# Altium PCB 编码器v6.0.PcbDoc
Units mil, origin at the board's own origin, x right, y up, seen from the top; angles counter-clockwise.
Board outline 2920.03 x 1708.32 mil, 2 copper layers (Top Layer, Bottom Layer); 85 components, 81 nets, 300 pads, 297 vias.
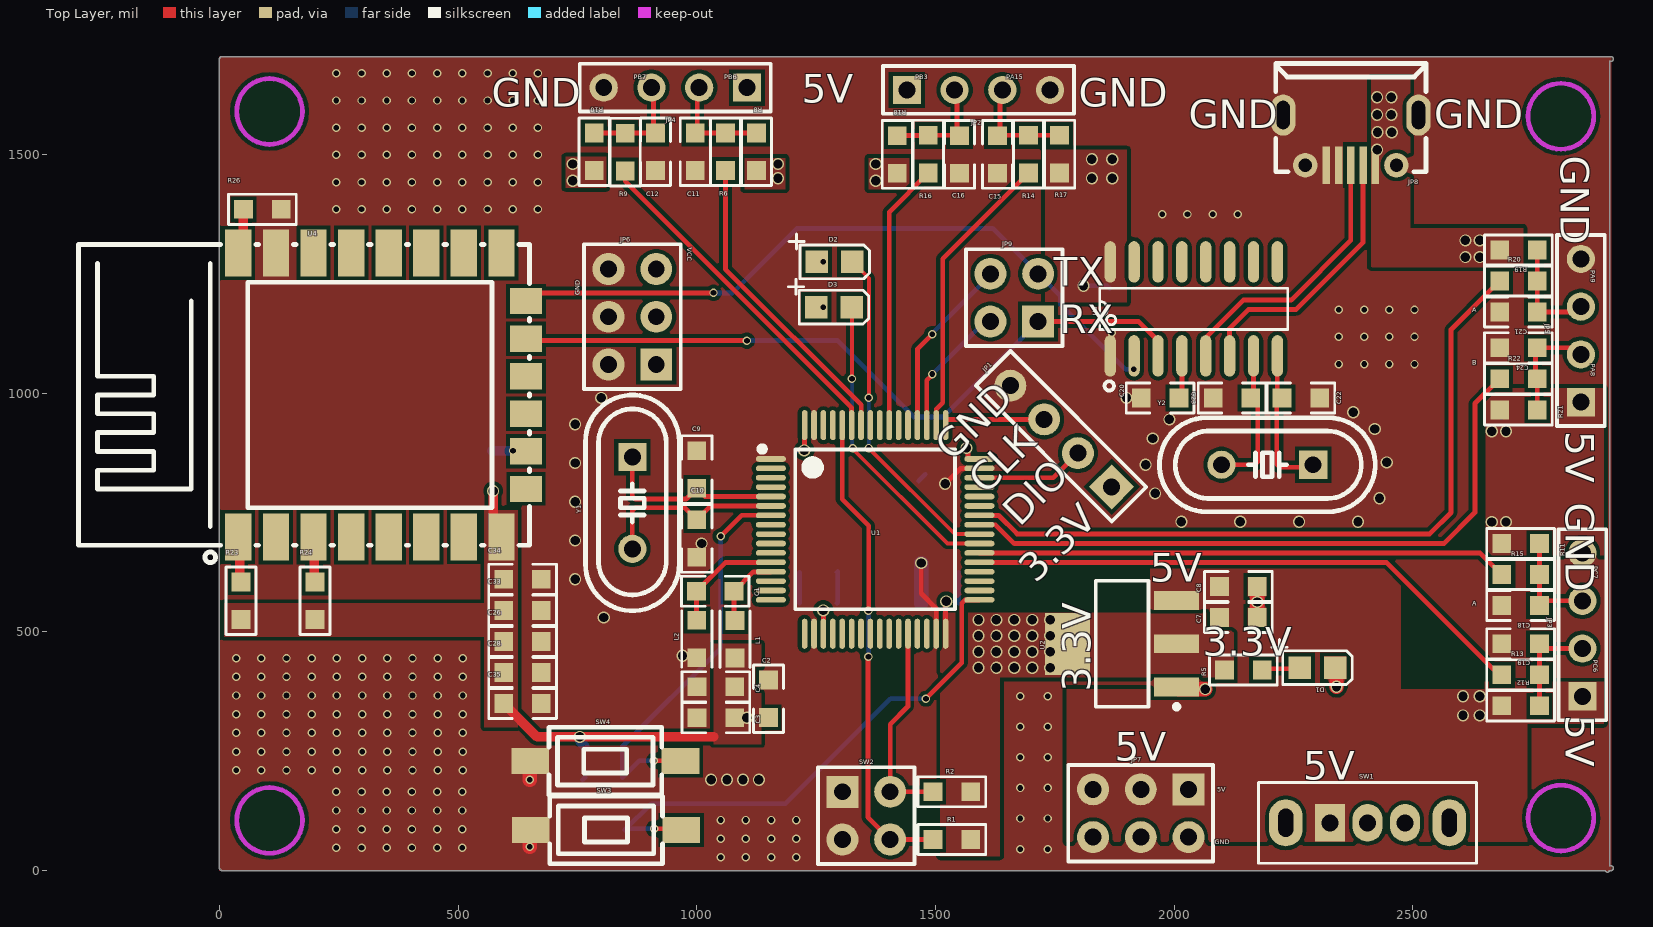
[diagram p0: Top Layer view]
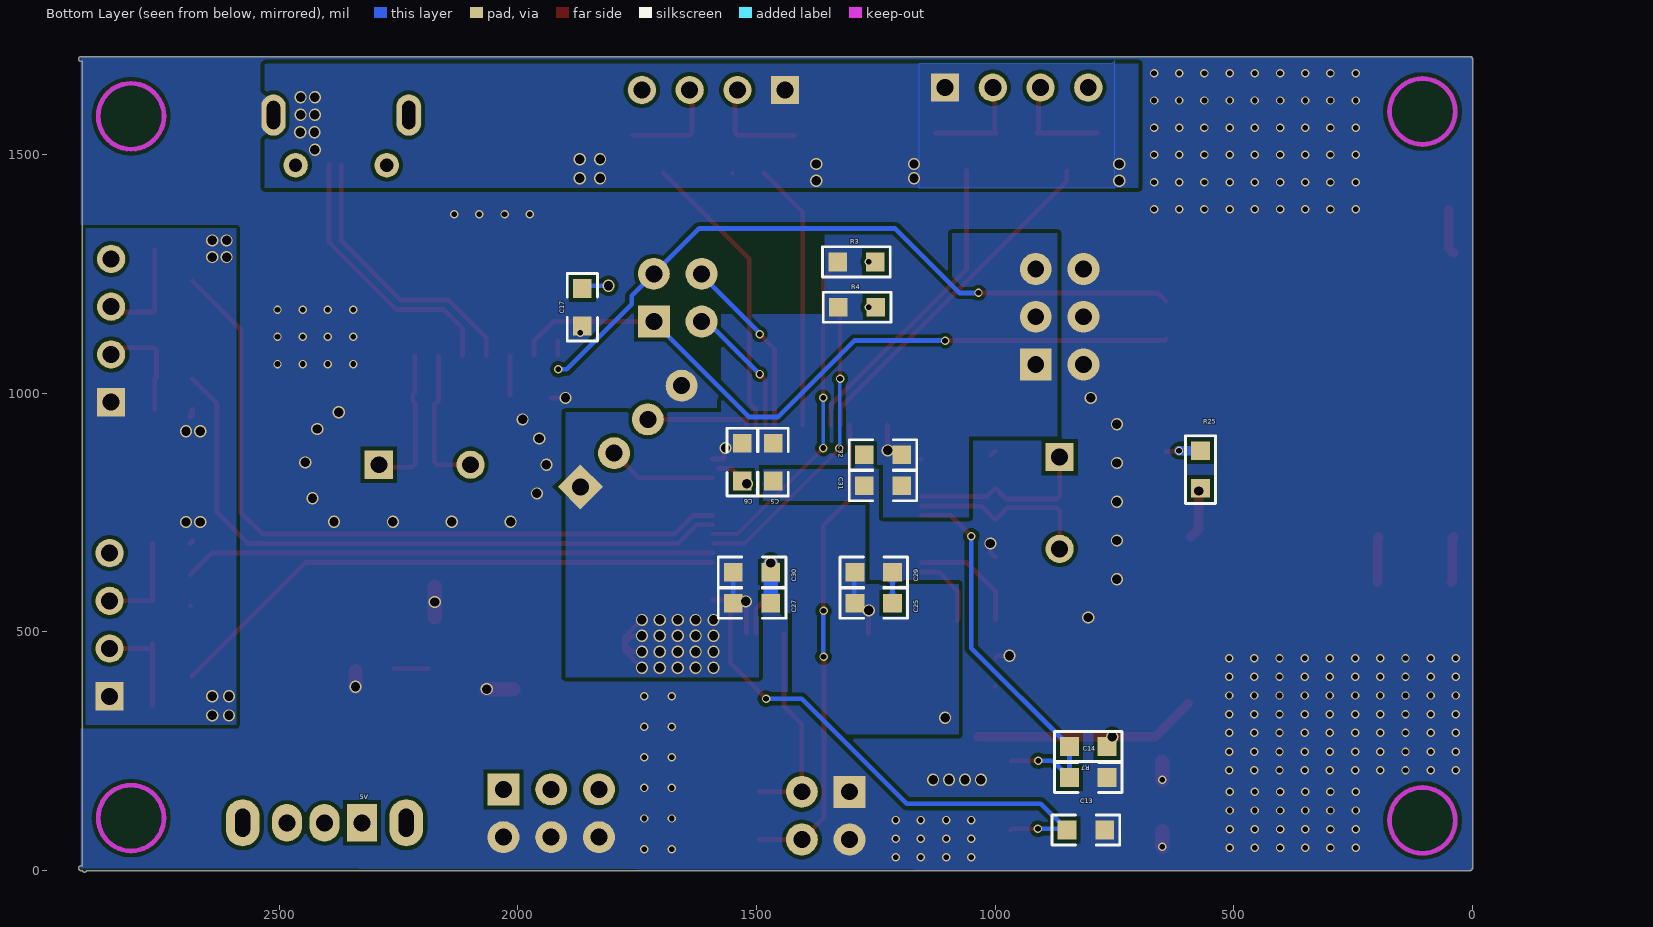
[diagram p1: Bottom Layer view, seen from below]

## Layer stack, top to bottom
Top Solder: solder mask 0.4, Solder Resist, Dk 3.5
Top Layer: signal copper 1.4
Dielectric 1: dielectric 12.6, FR-4, Dk 4.8
Bottom Layer: signal copper 1.4
Bottom Solder: solder mask 0.4, Solder Resist, Dk 3.5

## Board outline
-0.01,5.01 ccw(c5,5.01) 5,-0.01 2902.68,-0.01 ccw(c2907.39,1.7) 2912.11,-0.01 2915,-0.01 ccw(c2915,5.01) 2920.01,5.01 ccw(c2915,5.01) 2915,10.02 2912.41,10.02 2912.41,1694.99 2915,1694.99 ccw(c2915,1700.01) 2920.01,1700.01 ccw(c2915,1700.01) 2915,1705.02 5,1705.02 ccw(c5,1700.01) -0.02,1700.01

## Design rules (kind name [scope] priority, off if disabled: settings)
Clearance Clearance_2 [InNetClass('PWR')] p1: gap=8 ignorepadtopadclearanceinfootprint=TRUE
Clearance Clearance_1 [InNetClass('GND')] p2: gap=8 ignorepadtopadclearanceinfootprint=TRUE
Clearance Clearance_3 [InNetClass('SIGNAL')] p3: gap=8 ignorepadtopadclearanceinfootprint=TRUE
Clearance [All] p4: gap=8 ignorepadtopadclearanceinfootprint=TRUE
DiffPairsRouting [All] p1: maxlimit=11.81 minlimit=8 mostfreqgap=10 toplayer_minwidth=8 toplayer_maxwidth=10 toplayer_prefwidth=10 bottomlayer_minwidth=8 bottomlayer_maxwidth=10 bottomlayer_prefwidth=10 maxuncoupledlength=500
PolygonConnect [All] p1: connectstyle=Direct reliefconductorwidth=10 reliefentries=4 polygonreliefangle="90 Angle" airgapwidth=10
RoutingVias [All] p1: holewidth=28 width=50 viastyle="Through Hole" minholewidth=28 minwidth=50 maxholewidth=28 maxwidth=50
SolderMaskExpansion [All] p1: expansion=4 istentingtop=FALSE
Width [All] p1: maxlimit=100 minlimit=8 preferedwidth=10
29 further rules are at their usual default settings.

## Classes and differential pairs
net class SIGNAL: BOOT0 BOOT1 CH340_D+ CH340_D- NetC9_1 NetC10_1 NetC11_2 NetC12_2 NetC15_2 NetC16_1 NetC18_1 NetC19_1 NetC20_1 NetC21_1 NetC22_1 NetC23_1 NetC24_1 NetD1_1 NetD2_1 NetD3_1 NetF1_2 NetR23_2 NetR24_2 NetR25_1 NetR26_1 PA0 PA1 PA2 PA3 PA4 PA5 PA6 PA7 PA8 PA9 PA10 PA11 PA12 PA15 PB0 PB1 PB3 PB4 PB5 PB6 PB7 PB8 PB9 PB10 PB11 PB12 PB13 PB14 PB15 PC0 PC1 PC2 PC3 PC4 PC5 PC6 PC7 PC8 PC9 PC10 PC11 PC12 PC13 PC14 PC15 PD2 RESET RX SWCLK SWDIO TX VDDA VSSA
net class GND: GND
net class PWR: 3.3V 5V

## Components (designator, comment, footprint, x,y, rotation, side; value= is the part's Value field where it differs from the comment)
C1 "0805c" 0805C 1038.74,585.01 r180 top
C2 "0805c" 0805C 1150,360.01 r90 top
C3 "0805c" 0805C 1040,320.01 r180 top
C4 "0805c" 0805C 1040,385.01 r180 top
C5 "0805c" 0805C 1465,855.64 r90 bottom
C6 "0805c" 0805C 1530,855.64 r90 bottom
C7 "0805c" 0805C 2134.37,530.01 r0 top
C8 "0805c" 0805C 2134.37,595.01 r0 top
C9 "22pF" 0805C 1000,840.01 r90 top
C10 "22pF" 0805C 1000,695.64 r270 top
C11 "10nF" 0805C 996.67,1505.64 r90 top
C12 "10nF" 0805C 913.33,1505.64 r90 top
C13 "0805c" 0805C 810,85.01 r180 bottom
C14 "0805c" 0805C 805,195.01 r180 bottom
C15 "10nF" 0805C 1630,1500.01 r90 top
C16 "10nF" 0805C 1550,1500.01 r270 top
C17 "0805c" 0805C 1864.8,1180.01 r90 bottom
C18 "10nF (103) 10% 50V" 0805C 2725.63,555.01 r180 top
C19 "10nF (103) 10% 50V" 0805C 2725.63,475.01 r180 top
C20 "0805c" 0805C 1970.43,990.01 r180 top
C21 "10nF" 0805C 2721.06,1170.01 r180 top
C22 "0805c" 0805C 2265.43,990.01 r0 top
C23 "0805c" 0805C 2121.06,990.01 r180 top
C24 "10nF" 0805C 2721.06,1095.01 r180 top
C25 "0805c" 0805C 1254.37,560.01 r0 bottom
C26 "0805c" 0805C 635,480.01 r0 top
C27 "0805c" 0805C 1509.37,560.01 r0 bottom
C28 "0805c" 0805C 635,415.01 r0 top
C29 "0805c" 0805C 1254.37,625.01 r0 bottom
C30 "0805c" 0805C 1509.37,625.01 r0 bottom
C31 "0805c" 0805C 1235,806.07 r180 bottom
C32 "0805c" 0805C 1235,871.07 r180 bottom
C33 "0805c" 0805C 635,545.01 r0 top
C34 "10uF (106) 10% 25V" 0805C 635,610.01 r180 top
C35 "100nF(104) 10% 50V" 0805C 635,350.01 r180 top
D1 "LED" 0805D 2300,425.01 r0 top
D2 "LED" 0805D 1288.66,1275.01 r0 top
D3 "LED" 0805D 1287.4,1180.01 r0 top
JP1 "SWD" SWD 1762.95,909.65 r135 top
JP2 "PIN4" HDR1X4 1440,1635.01 r0 top
JP3 "PIN4" HDR1X4 2855,365.01 r90 top
JP4 "PIN4" HDR1X4 1105,1640.01 r180 top
JP5 "PIN4" HDR1X4 2851.81,981.07 r90 top
JP6 "PWR3.3V" PWR 915,1060.01 r90 top
JP7 "PWR5V" PWR 2030,170.01 r180 top
JP8 "microusb" MICRO-USB-SMD_MICROXNJ 2370,1530.01 r180 top
JP9 "2*2" CON20VP2R54-2X2TM 1665,1200.01 r90 top
L1 "0805L" 0805L 1080,484.38 r90 top
L2 "0805L" 0805L 1000,485.01 r90 top
R1 "0805r" 0805R 1534.37,65.01 r180 top
R2 "0805r" 0805R 1534.37,165.01 r180 top
R3 "0805r" 0805R 1290.63,1275.01 r180 bottom
R4 "0805r" 0805R 1289.37,1180.01 r180 bottom
R5 "0805r" 0805R 2145,420.01 r180 top
R6 "10KΩ" 0805R 1060,1505.64 r270 top
R7 "0805r" 0805R 805,260.01 r180 bottom
R8 "10KΩ" 0805R 1125,1505.64 r90 top
R9 "10KΩ" 0805R 850,1505.01 r270 top
R10 "10KΩ" 0805R 785,1505.64 r90 top
R11 "10KΩ" 0805R 2725.63,685.01 r0 top
R12 "10KΩ" 0805R 2725.63,345.01 r180 top
R13 "10KΩ" 0805R 2725.63,410.01 r0 top
R14 "10KΩ" 0805R 1695,1500.64 r270 top
R15 "10KΩ" 0805R 2725.63,620.01 r0 top
R16 "10KΩ" 0805R 1485,1500.64 r270 top
R17 "10KΩ" 0805R 1760,1500.64 r270 top
R18 "10KΩ" 0805R 1420,1500.01 r90 top
R19 "10KΩ" 0805R 2721.06,1300.01 r0 top
R20 "10KΩ" 0805R 2721.06,1235.01 r180 top
R21 "10KΩ" 0805R 2721.06,965.01 r0 top
R22 "10KΩ" 0805R 2721.06,1030.01 r180 top
R23 "0805r" 0805R 45,565.01 r90 top
R24 "0805r" 0805R 200,565.01 r90 top
R25 "0805r" 0805R 570,840.01 r270 bottom
R26 "0805r" 0805R 90,1385.01 r0 top
SW1 "SWTICH_3P" SWITCH_3P 2326.26,100.01 r0 top
SW2 "SW_BOOT" CON20VP2R54-2X2TM 1355,115.01 r270 top
SW3 "KEY" SW-SMD_L6.1-W3.6-LS8.0 810,85.01 r180 top
SW4 "KEY" SW-SMD_L6.1-W3.6-LS8.0 808.34,229.27 r180 top
U1 "STM32F103RCT6" PCBComponent_1 1206.61,879.53 r270 top
U2 "ASM1117-3.3" SOT223_N 1890.83,475.01 r180 top
U3 "CH340G" SOP16 2041.06,1176.58 r0 top
U4 "" WIFIM-SMD_ESP-12F-ESP8266MOD 340.86,996.19 r0 top
Y1 "8MHz" HC-49US_L11.5-W4.5-P4.88 865,770.01 r270 top
Y2 "12MHz" HC-49US_L11.5-W4.5-P4.88 2195,850.01 r180 top

## Footprints (in the part's own frame and the unit in brackets; to place one, negate y for a bottom-side part, rotate by r counter-clockwise, add the part's x,y. Pads: shape width x height; smd on the part's side, far side on the other; paste and mask are expansions set on the pad)
0805C [mm]
  rect 1x1 smd: 1(-1,0) 2(1,0)
  silkscreen extent -1.8,-0.8 1.8,0.8
0805D [mm]
  rect 1.2x1.2 smd: 1(-0.95,0) 2(0.95,0)
  silkscreen extent -2.42,-0.9 1.85,1.49
0805L [mm]
  rect 1x1 smd: 1(-1,0) 2(1,0)
  silkscreen extent -1.5,-0.8 1.5,0.8
0805R [mm]
  rect 1x1 smd: 1(-1,0) 2(1,0)
  silkscreen extent -1.8,-0.8 1.8,0.8
CON20VP2R54-2X2TM [mm]
  rect 1.7x1.7 hole 0.9: 1(-1.27,-1.27)
  round 1.7 hole 0.9: 2(-1.27,1.27) 3(1.27,-1.27) 4(1.27,1.27)
  silkscreen extent -2.57,-2.57 2.57,2.57
HC-49US_L11.5-W4.5-P4.88 [mm]
  rect 1.5x1.5 hole 0.9: 1(-2.44,0)
  round 1.5 hole 0.9: 2(2.44,0)
  silkscreen extent -5.74,-2.5 5.74,2.5
HDR1X4 [mm] "Connector; Header; 4 Position"
  rect 1.5x1.5 hole 0.9: 1(0,0)
  round 1.5 hole 0.9: 2(2.54,0) 3(5.08,0) 4(7.62,0)
  silkscreen extent -1.27,-1.27 8.89,1.27
MICRO-USB-SMD_MICROXNJ [mm]
  rect 0.4x2 smd: 1(-1.3,1.327) 2(-0.65,1.327) 3(0,1.327) 4(0.65,1.327) 5(1.3,1.327)
  round 1.3 hole 0.7: 6(2.425,1.335) 9(-2.425,1.335)
  oval 1.3x2.2 hole 0.7 slot 1.5 at 90 deg: 7(3.6,-1.335) 8(-3.6,-1.335)
  silkscreen extent -4,-4.07 4,1.68
PCBComponent_1 [mm]
  oval 0.3x1.6 smd: 1(0.441,-1.311) 2(0.941,-1.311) 3(1.441,-1.311) 4(1.941,-1.311) 5(2.441,-1.311) 6(2.941,-1.311) 7(3.441,-1.311) 8(3.941,-1.311) 9(4.441,-1.311) 10(4.941,-1.311) 11(5.441,-1.311) 12(5.941,-1.311) 13(6.441,-1.311) 14(6.941,-1.311) 15(7.441,-1.311) 16(7.941,-1.311) 33(7.941,9.789) 34(7.441,9.789) 35(6.941,9.789) 36(6.441,9.789) 37(5.941,9.789) 38(5.441,9.789) 39(4.941,9.789) 40(4.441,9.789) 41(3.941,9.789) 42(3.441,9.789) 43(2.941,9.789) 44(2.441,9.789) 45(1.941,9.789) 46(1.441,9.789) 47(0.941,9.789) 48(0.441,9.789)
  oval 1.6x0.3 smd: 17(9.741,0.489) 18(9.741,0.989) 19(9.741,1.489) 20(9.741,1.989) 21(9.741,2.489) 22(9.741,2.989) 23(9.741,3.489) 24(9.741,3.989) 25(9.741,4.489) 26(9.741,4.989) 27(9.741,5.489) 28(9.741,5.989) 29(9.741,6.489) 30(9.741,6.989) 31(9.741,7.489) 32(9.741,7.989) 49(-1.359,7.989) 50(-1.359,7.489) 51(-1.359,6.989) 52(-1.359,6.489) 53(-1.359,5.989) 54(-1.359,5.489) 55(-1.359,4.989) 56(-1.359,4.489) 57(-1.359,3.989) 58(-1.359,3.489) 59(-1.359,2.989) 60(-1.359,2.489) 61(-1.359,1.989) 62(-1.359,1.489) 63(-1.359,0.989) 64(-1.359,0.489)
  silkscreen extent -0.24,-1.92 8.44,8.49
PWR [mm]
  rect 1.7x1.7 hole 0.9: 1(0,0)
  round 1.7 hole 0.9: 2(0,2.54) 3(2.54,0) 4(2.54,2.54) 5(5.08,0) 6(5.08,2.54)
  silkscreen extent -1.3,-1.3 6.4,3.84
SOP16 [mm]
  oval 0.6x2.2 smd: 1(-4.445,-2.5) 2(-3.175,-2.5) 3(-1.905,-2.5) 4(-0.635,-2.5) 5(0.635,-2.5) 6(1.905,-2.5) 7(3.175,-2.5) 8(4.445,-2.5) 9(4.445,2.5) 10(3.175,2.5) 11(1.905,2.5) 12(0.635,2.5) 13(-0.635,2.5) 14(-1.905,2.5) 15(-3.175,2.5) 16(-4.445,2.5)
  silkscreen extent -5,-4.35 5,1.1
SOT223_N [mm] "SOT223, 4-Leads, Body 6.5x3.5mm, Pitch 2.3mm, Lead Span 7mm, IPC Medium Density"
  rect 2.4x1 smd: 1(-2.9,2.3) 2(-2.9,0) 3(-2.9,-2.3)
  rect 2.4x3.3 smd: 4(2.9,0)
  silkscreen extent -3.03,-3.35 1.4,3.47, body extent -1.85,-3.35 1.85,3.35, height 1.7
SW-SMD_L6.1-W3.6-LS8.0 [mm]
  rect 2x1.38 smd: 1(-4,0) 2(4,0)
  silkscreen extent -3,-1.8 3,1.8
SWD [mm]
  rect 1.7x1.7 hole 0.9: 1(-3.81,0)
  round 1.7 hole 0.9: 2(-1.27,0) 3(1.27,0) 4(3.81,0)
  silkscreen extent -5.11,-1.3 5.11,1.3
SWITCH_3P [mm]
  rect 1.6x2 hole 0.9: 1(0,0)
  oval 1.6x2 hole 0.9: 2(2,0) 3(4,0)
  oval 1.8x2.5 hole 1.5 slot 0.8 at 0 deg: 4(-2.35,0) 4(6.35,0)
  silkscreen extent -3.8,-2.15 7.8,2.15
WIFIM-SMD_ESP-12F-ESP8266MOD [mm]
  rect 1.4x2.5 smd: 1(-7.651,-7.551) 2(-5.651,-7.551) 3(-3.651,-7.551) 4(-1.651,-7.551) 5(0.349,-7.551) 6(2.349,-7.551) 7(4.349,-7.551) 8(6.349,-7.551) 9(6.349,7.549) 10(4.349,7.55) 11(2.349,7.551) 12(0.349,7.551) 13(-1.651,7.55) 14(-3.651,7.551) 15(-5.651,7.55) 16(-7.651,7.551)
  rect 1.7x1.4 smd: 17(7.65,-5) 18(7.649,-3.002) 19(7.649,-1.003) 20(7.649,0.998) 21(7.649,2.997) 22(7.65,4.997)
  silkscreen extent -16.15,-8.92 7.85,8

## Part data
C9 C10: library part "0805 22pF (220) 5% 50V", "贴片电容", Package=0805, SuppliersPartNumber=C1804, ComponentLink1Description=供应商链接, ComponentLink1URL=http://www.szlcsc.com/product/details_2156.html, Supplier=LC
C11 C12 C15 C16 C18 C19 C21 C24: library part "0805 10nF (103) 10% 50V", "贴片电容", Package=0805, SuppliersPartNumber=C1710, ComponentLink1Description=供应商链接, ComponentLink1URL=http://www.szlcsc.com/product/details_2062.html, Supplier=LC
C34: library part "0805 10uF (106) 10% 25V", "贴片电容", Package=0805, SuppliersPartNumber=C15850, ComponentLink1Description=供应商链接, ComponentLink1URL=http://www.szlcsc.com/product/details_16532.html, Supplier=LC
C35: library part "0805 100nF(104) 10% 50V", "贴片电容", Package=0805, SuppliersPartNumber=C49678, ComponentLink1Description=供应商链接, ComponentLink1URL=http://www.szlcsc.com/product/details_50686.html, Supplier=LC
JP8: library part miniusb
R6 R8 R9 R10 R11 R12 R13 R14 R15 R16 R17 R18 R19 R20 R21 R22: library part "0805 10KΩ (1002) 1%", "贴片电阻", Package=0805, SuppliersPartNumber=C17414, ComponentLink1Description=供应商链接, ComponentLink1URL=http://www.szlcsc.com/product/details_18102.html, Supplier=LC
SW3 SW4: library part KEY_4P
U1: "ARM Cortex-M3 32-bit MCU, 256 KB Flash, 48 KB Internal RAM, 51 I/Os, 64-pin LQFP, -40 to 85 degC, Tray", I/Os (High Current)=51, Operating Frequency(F) (Processor speed) (MHz)=72, Supplier Part Number 1=497-9033-ND, Supply Voltage(Vcc) min (V)=2, A/D Converter="3x12-bit (16 Channel)", ComponentLink1Description="Manufacturer URL", ComponentLink1URL=http://www.st.com/web/en/home.html, ComponentLink2Description=Datasheet, ComponentLink2URL=http://www.st.com/st-web-ui/static/active/en/resource/technical/document/datasheet/CD00191185.pdf, ComponentLink3Description="Package Specification", ComponentLink3URL=http://www.st.com/st-web-ui/static/active/en/resource/technical/document/datasheet/DM00037051.pdf, Core="ARM Cortex-M3", D/A Converter="2x12-bit (2 Channel)", DatasheetVersion="Rev. 8", FLASH Size (Prog) (kB)=256, Internal RAM Size (kB)=48, Mounting Technology="Surface Mount", PackageDescription="64-Pin Low Profile Quad Flat Package, 10 x 10 mm Body, 0.5 mm Pitch", PackageReference=LQFP64, PackageVersion="Rev. 4, 06/2013", Packing=Tray, PartNumber=STM32F103RCT6, Supplier 1=Digi-Key, Supplier 2=Newark, Supplier 3=Newark, Supplier 4=Mouser, Supplier Part Number 2=01P4099, Supplier Part Number 3=57P1227, Supplier Part Number 4=511-STM32F103RCT6
U4: library part ESP8266
Y1 Y2: library part "SMD-5032_2P 8MHz 20ppm 20pF", "贴片晶振", Package=SMD-5032_2P, SuppliersPartNumber=C115962, ComponentLink1Description=供应商链接, ComponentLink1URL=http://www.szlcsc.com/product/details_117214.html, Supplier=LC

## Via types
v1: diameter 17.72, hole 11.81, Top Layer to Bottom Layer, 209 vias
v2: diameter 25.59, hole 19.68, Top Layer to Bottom Layer, 88 vias

## Nets (pads, with @x,y where several pads share a name; then routed paths per layer and width w, separated by ;. In a path a pad name is that pad's centre, name@x,y a point inside that pad or via, vN(x,y) a via of type N, cw(c..) or ccw(c..) an arc to the next point about the centre after c; other vN are vias at no path point)
3.3V: C2.1 C3.1 C4.1 C5.2 C6.2 C25.2 C26.1 C27.2 C28.1 C29.2 C30.2 C31.2 C32.2 C33.1 C34.2 C35.2 JP1.1 JP6.1 JP6.3 JP6.5 L1.1 R1.1 R2.1 R3.1 R4.1 R5.2 R7.2 R23.1 R24.1 R25.2 U1.19 U1.32 U1.48 U1.64 U2.2 U2.4 U4.8 | length 1187.5
  Top Layer w10: v2(1225,880.01) 1225.51,880.52 1225.51,932.69 U1.64 ; v2(1265,545.01) 1265.11,544.89 1265.11,496.15 U1.19 U1.19@1265.58,496.38 ; U1.32@1520.79,496.91 1520.79,562.17 v2(1522.46,563.83) ; v2(1565,885.01) 1567.98,882.03 1567.98,863.01 1568.82,862.18 U1.48 ; v2(1740,425) 1776.65,461.65 U2.4 ; v2(1740,458.33) 1759.98,458.33 U2.4 ; v2(1740,491.67) 1760,491.67 U2.4 ; v2(1740,525) 1776.65,488.35 U2.4
  Top Layer w20: v2(573.28,795.01) 573.28,716.47 U4.8 ; C35.2 665.64,280 1035.01,280
  Bottom Layer w10: R25.2 573.28,797.36 v2(573.28,795.01) ; R7.2@765,260.64 R7.2 ; C32.2@1210.31,880.01 v2(1225,880.01) ; C25.2 1295,561.27 1295,626.27 C29.2 ; v2(1522.46,563.83) v2@1522.46,564.31 ; C27.2 C30.2
  Bottom Layer w20: v2(755,280) 756.07,278.93 756.07,269.57 R7.2@765,260.64
  other v2: 1105,320.01 1590,425 1627.5,425 1665,425 1702.5,425 1590,458.33 1627.5,458.33 1665,458.33 1702.5,458.33 1590,491.67 1627.5,491.67 1665,491.67 1702.5,491.67 1590,525 1627.5,525 1665,525 1702.5,525
5V: C7.1 C8.1 C17.2 JP2.1 JP3.1 JP4.1 JP5.1 JP7.1 JP7.3 JP7.5 JP8.1 R8.1 R10.1 R11.1 R12.2 R17.2 R18.1 R19.1 R21.1 SW1.1 U2.3 U3.16 | length 92.8
  Top Layer w10: v2@2420.89,1539.12 v2@2421.03,1538.98 ; v2(2640,365.01) 2644.22,365.01 v2@2649.53,359.69
  Top Layer w11: R11.1@2681.69,689.58 R11.1 ; R21.1 2681.69,953.32 2683.77,953.32 R21.1@2686.26,950.82
  Bottom Layer w10: v2(1810,1225.01) 1859.17,1225.01 C17.2
  other v2: 2605,325.01 2640,325.01 2605,365.01 2665,730.01 2695,730.01 2665,920.01 2695,920.01 2610,1285 2640,1285 2610,1320 2640,1320 740,1445.01 1375,1445.01 1170,1450.01 1827.5,1450 1870,1450 740,1480.01 1170,1480.01 1375,1480.01 1827.5,1490 1870,1490 2425,1510.01 2425.89,1546.68 2455.89,1546.68 2425,1583.34 2455,1583.34 2425,1620.01 2455,1620.01
BOOT0: R1.2 SW2.4 U1.60 | length 1001.2
  Top Layer w10: U1.60 1304.6,777.58 1360,722.18 1360,544.59 v1(1359.57,544.16) ; v1(1359.57,448.06) 1358.54,447.02 1358.54,111.47 SW2.4 R1.2
  Bottom Layer w10: v1(1359.57,448.06) 1359.99,448.48 1359.99,543.73 v1@1360.42,544.16
BOOT1: R2.2 SW2.2 U1.28 | length 436.5
  Top Layer w10: U1.28 1442.4,343.89 1405,306.49 SW2.2 R2.2
CH340_D+: JP8.3 U3.5 | length 584.1
  Top Layer w10: U3.5 2066.06,1116.07 2145,1195.01 2245,1195.01 2370,1320.01 JP8.3
CH340_D-: JP8.2 U3.6 | length 574
  Top Layer w10: U3.6 2116.06,1136.07 2155,1175.01 2255,1175.01 2395.59,1315.6 JP8.2
GND: C2.2 C3.2 C4.2 C5.1 C6.1 C7.2 C8.2 C9.2 C10.2 C11.1 C12.1 C13.2 C14.2 C15.1 C16.2 C17.1 C18.2 C19.2 C20.2 C21.2 C22.2 C23.2 C24.2 C25.1 C26.2 C27.1 C28.2 C29.1 C30.1 C31.1 C32.1 C33.2 C34.1 C35.1 D1.2 JP1.4 JP2.4 JP3.4 JP4.4 JP5.4 JP6.2 JP6.4 JP6.6 JP7.2 JP7.4 JP7.6 JP8.4 JP8.5 JP8.6 JP8.7 JP8.8 JP8.9 L2.1 R26.2 SW2.1 SW2.3 SW3.2 SW4.2 U1.1 U1.18 U1.31 U1.47 U1.63 U2.1 U3.1 U4.15 | length 811
  Top Layer w10: SW3.2@650,82.49 SW3.2 ; v2(970,450.01) 995.63,450.01 L2.1 ; C4.2@1000,385.64 C4.2 ; C10.2 1010,666.27 v2(1010,685.01) ; C9.2 C9.2@1009.37,870.01 ; U1.1 U1.1@1155.35,861.83 ; SW2.1@1280,190.01 SW2.1 ; v2(1470,644.21) 1470,580.32 1501.45,548.87 U1.31 ; v2(1520,810.01) 1552.13,842.14 1579.37,842.14 U1.47@1579.56,842.33 ; v2(1900,990.01) C20.2 ; C18.2@2685,553.75 C18.2
  Top Layer w30: v1(650,50.01) SW3.2@650,82.49 ; v1(650,190.01) SW4.2@650,228.41 ; U2.1@2009.45,380.01 v2(2065,380.01) ; C7.2 v2(2173.74,562.51) C8.2 ; v2(2340,385) D1.2@2340,417.61
  Bottom Layer w10: C14.2@760.63,190.01 C14.2 ; JP4.4 JP4.4@815.57,1640.01 ; C25.1 C29.1 ; C5.1 C5.1@1478.74,830.01 ; JP1.4@1656.89,1000.31 JP1.4
  Bottom Layer w30: C27.1 v2(1470,644.21)
  other v1: 1050,27.5 1102.78,27.5 1155.56,27.5 1208.33,27.5 1677.22,45 1735,45 245,47.5 297.78,47.5 350.56,47.5 403.33,47.5 456.11,47.5 508.89,47.5 1050,66.67 1102.78,66.67 1155.56,66.67 1208.33,66.67 245,86.67 297.78,86.67 350.56,86.67 403.33,86.67 456.11,86.67 508.89,86.67 1050,105.83 1102.78,105.83 1155.56,105.83 1208.33,105.83 1677.22,109 1735,109 245,125.83 297.78,125.83 350.56,125.83 403.33,125.83 456.11,125.83 508.89,125.83 245,165 297.78,165 350.56,165 403.33,165 456.11,165 508.89,165 1677.22,173 1735,173 35,210 87.78,210 140.56,210 193.33,210 246.11,210 298.89,210 351.67,210 404.44,210 457.22,210 510,210 1677.22,237 1735,237 35,249.17 87.78,249.17 140.56,249.17 193.33,249.17 246.11,249.17 298.89,249.17 351.67,249.17 404.44,249.17 457.22,249.17 510,249.17 35,288.33 87.78,288.33 140.56,288.33 193.33,288.33 246.11,288.33 298.89,288.33 351.67,288.33 404.44,288.33 457.22,288.33 510,288.33 1677.22,301 1735,301 35,327.5 87.78,327.5 140.56,327.5 193.33,327.5 246.11,327.5 298.89,327.5 351.67,327.5 404.44,327.5 457.22,327.5 510,327.5 1677.22,365 1735,365 35,366.67 87.78,366.67 140.56,366.67 193.33,366.67 246.11,366.67 298.89,366.67 351.67,366.67 404.44,366.67 457.22,366.67 510,366.67 35,405.83 87.78,405.83 140.56,405.83 193.33,405.83 246.11,405.83 298.89,405.83 351.67,405.83 404.44,405.83 457.22,405.83 510,405.83 35,445 87.78,445 140.56,445 193.33,445 246.11,445 298.89,445 351.67,445 404.44,445 457.22,445 510,445 2345,1061 2397.78,1061 2450.56,1061 2503.33,1061 2345,1118 2397.78,1118 2450.56,1118 2503.33,1118 1869.08,1126.2 2345,1175 2397.78,1175 2450.56,1175 2503.33,1175 1975,1375 2027.78,1375 2080.56,1375 2133.33,1375 245,1385 297.78,1385 350.56,1385 403.33,1385 456.11,1385 508.89,1385 561.67,1385 614.44,1385 667.22,1385 245,1442 297.78,1442 350.56,1442 403.33,1442 456.11,1442 508.89,1442 561.67,1442 614.44,1442 667.22,1442 245,1499 297.78,1499 350.56,1499 403.33,1499 456.11,1499 508.89,1499 561.67,1499 614.44,1499 667.22,1499 245,1556 297.78,1556 350.56,1556 403.33,1556 456.11,1556 508.89,1556 561.67,1556 614.44,1556 667.22,1556 245,1613 297.78,1613 350.56,1613 403.33,1613 456.11,1613 508.89,1613 561.67,1613 614.44,1613 667.22,1613 245,1670 297.78,1670 350.56,1670 403.33,1670 456.11,1670 508.89,1670 561.67,1670 614.44,1670 667.22,1670
  other v2: 1030,190.01 1063.33,190.01 1096.67,190.01 1130,190.01 805,530.01 745,610.01 745,691.26 2015,730.8 2138.33,730.8 2261.67,730.8 2385,730.8 745,772.51 2430,780.01 1960,790.01 1940,850.01 745,853.76 2445,855.01 1955,905.01 2420,925.01 745,935.01 1990,945.01 2375,960.01 800,990.01
NetC9_1: C9.1 U1.5 Y1.1 | length 391.1
  Top Layer w10: Y1.1 865,783.87 870.86,778.01 977.37,778.01 C9.1 1017.2,783.44 U1.5
NetC10_1: C10.1 U1.6 Y1.2 | length 394.9
  Top Layer w10: Y1.2 865,754.15 870.86,760.01 975,760.01 C10.1 1028.74,763.75 U1.6
NetC11_2: C11.2 JP4.2 R6.1 R8.2 | length 220.9
  Top Layer w10: C11.2 R8.2 ; C11.2@1000.83,1549.18 1000.83,1635.84 JP4.2
NetC12_2: C12.2 JP4.3 R9.1 R10.2 | length 220.9
  Top Layer w10: R10.2 850,1545.01 909.17,1545.01 C12.2 ; JP4.3 909.17,1635.84 C12.2@909.17,1549.18
NetC15_2: C15.2 JP2.3 R14.1 R17.1 | length 218.6
  Top Layer w10: JP2.3 1635,1630.01 1635,1545.87 1640.86,1540.01 R14.1 R17.1
NetC16_1: C16.1 JP2.2 R16.1 R18.2 | length 218.3
  Top Layer w10: R18.2@1420.31,1539.69 R16.1@1485,1539.69 ; R16.1 1539.14,1540.01 1545,1545.87 1545,1630.01 JP2.2
NetC18_1: C18.1 JP3.3 R11.2 R15.2 | length 210
  Top Layer w10: R11.2 R15.2 2765,565.01 JP3.3
NetC19_1: C19.1 JP3.2 R12.1 R13.2 | length 227.1
  Top Layer w10: R12.1 R13.2 C19.1@2765,465.01 ; C19.1 C19.1@2765,465.01 ; JP3.2@2850,460.01 JP3.2 C19.1@2765,465.01
NetC20_1: C20.1 U3.4 | length 81.9
  Top Layer w10: C20.1@2016.06,996.27 U3.4
NetC21_1: C21.1 JP5.3 R19.2 R20.1 | length 252
  Top Layer w10: R19.2 R20.1 C21.1 2834.11,1170.01 2844.1,1180 JP5.3@2865,1180 ; JP5.3@2838.54,1181.07 JP5.3
NetC22_1: C22.1 U3.8 Y2.1 | length 305.5
  Top Layer w10: U3.8 2216.06,1000.01 2220,996.07 2220,983.95 2215,978.95 2215,850.87 2220.86,845.01 Y2.1@2287.13,845.01
NetC23_1: C23.1 U3.7 Y2.2 | length 303.4
  Top Layer w10: Y2.2@2100,850.01 2169.14,850.01 2175,855.87 2175,975.44 2166.06,984.38 U3.7
NetC24_1: C24.1 JP5.2 R21.2 R22.1 | length 243.5
  Top Layer w10: R21.2 R22.1 2756.69,1033.75 2756.69,1091.27 C24.1 2837.87,1095.01 JP5.2 JP5.2@2838.54,1081.07
NetD1_1: D1.1 R5.1 | length 73.2
  Top Layer w10: R5.1@2186.87,422.51 D1.1@2260.1,422.51
NetD2_1: D2.1 R3.2
  other v1: 1265,1275.01
NetD3_1: D3.1 R4.2
  other v1: 1265,1180.01
NetF1_2: SW1.2
NetR23_2: R23.2 U4.1 | length 96.7
  Top Layer w20: U4.1 42.33,696.21 42.33,607.05 R23.2
NetR24_2: R24.2 U4.3 | length 95.7
  Top Layer w20: U4.3 198.57,697.45 198.57,605.81 R24.2
NetR25_1: R25.1 U4.18 | length 72.6
  Top Layer w10: v1(615,879.38) 616.37,878.01 U4.18
  Bottom Layer w20: R25.1 v1(615,879.38)
NetR26_1: R26.1 U4.16 | length 95.2
  Top Layer w20: U4.16 50,1303.81 R26.1@50,1384.38
PA0: U1.14
PA1: U1.15
PA2: U1.16
PA3: U1.17
PA4: U1.20
PA5: U1.21
PA6: U1.22
PA7: U1.23
PA8: R22.2 U1.41 | length 1382.6
  Top Layer w10: U1.41 1592.15,724.22 1625.51,724.22 1664.72,685.01 2565,685.01 2630,750.01 2630,978.32 R22.2
PA9: R20.2 U1.42 | length 1549.8
  Top Layer w10: U1.42@1592,743.72 1632.17,743.72 1670.89,705.01 2535,705.01 2580,750.01 2580,1133.32 2667.01,1220.32 R20.2
PA10: U1.43
PA11: U1.44
PA12: U1.45
PA15: R14.2 U1.50 | length 608.4
  Top Layer w10: U1.50 1501.6,933.19 1501.6,959.36 1501.73,959.49 1501.73,966.67 1515,979.93 1515,1281.27 R14.2
PB0: U1.26
PB1: U1.27
PB3: R16.2 U1.55 | length 562.2
  Top Layer w10: U1.55 1403.03,1379.3 R16.2
PB4: U1.56
PB5: U1.57
PB6: R6.2 U1.58 | length 650.7
  Top Layer w10: R6.2 1060,1259.69 1344.32,975.37 U1.58@1344.32,933.38
PB7: R9.2 U1.59 | length 728.6
  Top Layer w10: R9.2 850,1444.23 1323.94,970.29 U1.59@1323.94,933.38
PB8: U1.61
PB9: U1.62
PB10: U1.29
PB11: U1.30
PB12: C13.1 SW3.1 U1.33 | length 1135.2
  Top Layer w10: v1(910.41,87.51) 964.98,87.51 SW3.1 ; v1(1480,360.01) 1555,435.01 1555,560.14 1561.42,566.55 U1.33@1591.65,566.55
  Bottom Layer w10: v1(910.41,87.51) 851.87,87.51 C13.1 904.37,140.01 1185.01,140.01 1405.01,360.01 v1(1480,360.01)
PB13: U1.34
PB14: U1.35
PB15: U1.36
PC0: U1.8
PC1: U1.9
PC2: U1.10
PC3: U1.11
PC4: U1.24
PC5: U1.25
PC6: R13.1 U1.37 | length 1189.8
  Top Layer w10: U1.37@1592,645.01 2445,645.01 R13.1@2683.13,406.88
PC7: R15.1 U1.38 | length 1112.6
  Top Layer w10: U1.38@1592.32,665.01 2641.26,665.01 R15.1
PC8: D3.2 U1.39 | length 644
  Top Layer w8: v1@1324.8,1030.01 D3.2 ; v1(1326.46,884.79) 1326.46,883.55 1525,685.01 U1.39@1591.14,685.01
  Bottom Layer w8: v1(1325,1030.01) 1325.73,1029.28 1325.73,885.52 v1(1326.46,884.79)
PC9: D2.2 U1.40 | length 711.1
  Top Layer w8: D2.2 1360.43,1240.65 v1(1360.43,990.41) ; v1(1360,884.98) 1540.28,704.7 U1.40
  Bottom Layer w8: v1(1360,884.98) 1360.21,885.19 1360.21,990.2 v1(1360.43,990.41)
PC10: JP9.2 U1.51 | length 279.1
  Top Layer w10: U1.51 1481.77,1026.55 1493.14,1037.92 v1(1493.14,1040.01)
  Bottom Layer w10: v1(1493.14,1040.01) 1603.14,1150.01 JP9.2
PC11: JP9.4 U1.52 | length 380.3
  Top Layer w10: U1.52 1462.08,1092.21 v1(1493.14,1123.28)
  Bottom Layer w10: v1(1493.14,1123.28) 1493.14,1125.36 1615,1247.22 JP9.4
PC12: U1.53
PC13: U1.2
PC14: U1.3
PC15: U1.4
PD2: U1.54
RESET: C14.1 R7.1 SW4.1 U1.7 | length 849.7
  Top Layer w10: v1(910,230.01) 965.08,230.01 SW4.1 ; v1(1050,700.01) 1094.06,744.07 U1.7
  Bottom Layer w10: v1(910,230.01) 879.37,230.01 C14.1 R7.1 1050,465.64 v1(1050,700.01)
RX: JP9.1 U3.3 U4.21 | length 1523.1
  Top Layer w10: U4.21 646.19,1110 v1(1105,1110) ; JP9.1 1925.71,1150.01 1966.06,1109.65 U3.3
  Bottom Layer w10: v1(1105,1110) 1295.01,1110 1455,950.01 1515,950.01 JP9.1
SWCLK: JP1.3 U1.49 | length 217.9
  Top Layer w10: U1.49 1521.14,944.17 1521.98,945.01 JP1.3
SWDIO: JP1.2 U1.46 | length 227.6
  Top Layer w10: U1.46 1746.82,822.81 JP1.2
TX: JP9.3 U3.2 U4.22 | length 1499.8
  Top Layer w10: U4.22 659.14,1210.01 v1(1035,1210.01) ; U3.2 U3.2@1916.06,1109.65
  Bottom Layer w10: v1(1035,1210.01) 1075,1210.01 1210,1345.01 1620,1345.01 1761.46,1203.54 1761.46,1186.22 1897.68,1050.01 v1(1915,1050.01)
VDDA: C1.1 L1.2 U1.13 | length 155.9
  Top Layer w10: L1.2 1078.11,525.64 C1.1 1118.71,625.61 1154.65,625.61 U1.13
VSSA: C1.2 L2.2 U1.12 | length 241.4
  Top Layer w10: L2.2 999.37,525.01 C1.2 1059.37,645.01 U1.12@1155,645.01
pads on no net: SW1.3 SW1.4 U3.9 U3.10 U3.11 U3.12 U3.13 U3.14 U3.15 U4.2 U4.4 U4.5 U4.6 U4.7 U4.9 U4.10 U4.11 U4.12 U4.13 U4.14 U4.17 U4.19 U4.20

## Polygon pours and split planes (outlines as drawn)
GND on Top Layer "GND_L01_P052" (solid, remove dead copper, pour order 52): 0,1705 2915,1705 2915,0 2910,0 0,0
3.3V on Top Layer "3.3V_L01_P050" (solid, remove dead copper, pour order 50): 10,560.01 625,560.01 625,490.01 10,490.01
3.3V on Top Layer "3.3V_L01_P049" (solid, remove dead copper, pour order 49): 555,755.01 625,755.01 625,300.01 555,300.01
5V on Top Layer "5V_L01_P017" (solid, remove dead copper, pour order 17): 2412.26,1265.01 2412.26,1660.01 2493.94,1660.01 2493.94,1265.01
5V on Top Layer "5V_L01_P018" (solid, remove dead copper, pour order 18): 2731.02,1264.17 2415,1264.17 2415,1345.85 2731.02,1345.85
5V on Top Layer "5V_L01_P021" (solid, remove dead copper, pour order 21): 2475,635.01 1950,635.01 1950,315.4 2475,314.62
5V on Top Layer "5V_L01_P022" (solid, remove dead copper, pour order 22): 2440,60.01 1775,60.01 1775,380.01 2440,380.01
5V on Top Layer "5V_L01_P025" (solid, remove dead copper, pour order 25): 2330,380.01 2740,380.01 2740,60.01 2330,60.01
5V on Top Layer "5V_L01_P026" (solid, remove dead copper, pour order 26): 2650,195.01 2650,385.01 2740,385.01 2740,195.01
5V on Top Layer "5V_L01_P039" (solid, remove dead copper, pour order 39): 725,1495.01 810,1495.01 810,1430.01 725,1430.01
5V on Top Layer "5V_L01_P040" (solid, remove dead copper, pour order 40): 1100,1492.51 1185,1492.51 1185,1427.51 1100,1427.51
5V on Top Layer "5V_L01_P041" (solid, remove dead copper, pour order 41): 1445,1427.51 1360,1427.51 1360,1492.51 1445,1492.51
5V on Top Layer "5V_L01_P043" (solid, remove dead copper, pour order 43): 2652.26,660.01 2652.26,1010.01 2900,1010.01 2900,660.01
3.3V on Top Layer "3.3V_L01_P019" (solid, remove dead copper, pour order 19): 2125,405.01 1620,405.01 1620,540.01 2125,540.01
3.3V on Top Layer "3.3V_L01_P031" (solid, remove dead copper, pour order 31): 1510,540.01 1635,540.01 1635,30.01 1510,30.01
5V on Top Layer "5V_L01_P029" (solid, remove dead copper, pour order 29): 1730,1190.01 1730,1510.01 1900.84,1510.01 1900.84,1190.01
5V on Top Layer "5V_L01_P024" (solid, remove dead copper, pour order 24): 2650,395.01 2900,395.01 2900,307.69 2650,307.69
3.3V on Top Layer "3.3V_L01_P006" (solid, remove dead copper, pour order 6): 1035,475.01 1135,475.01 1135,265.01 1035,265.01
3.3V on Bottom Layer "3.3V_L02_P028" (solid, remove dead copper, pour order 28): 1072.5,1335.01 1357.5,1335.01 1357.5,965.01 1072.5,965.01
GND on Bottom Layer "GND_L02_P051" (solid, remove dead copper, pour order 51): 0,1705.01 5,1705.01 2915,1705.01 2915,5 0,0
5V on Bottom Layer "5V_L02_P038" (solid, remove dead copper, pour order 38): 1385,1690.01 2525,1690.01 2530,1695.01 2530,1430.01 1385,1430.01
3.3V on Bottom Layer "3.3V_L02_P047" (solid, remove dead copper, pour order 47): 1076.84,530.19 1320,530.19 1320,305.19 1076.84,305.19
3.3V on Bottom Layer "3.3V_L02_P046" (solid, remove dead copper, pour order 46): 1076.84,600.19 1425,600.19 1425,285.01 1076.84,285.01
3.3V on Bottom Layer "3.3V_L02_P007" (solid, remove dead copper, pour order 7): 1271.84,765.19 1515,765.19 1515,540.19 1271.84,540.19
5V on Bottom Layer "5V_L02_P042" (solid, remove dead copper, pour order 42): 2590,305.01 2590,1345.01 2905,1345.01 2905,305.01
5V on Bottom Layer "5V_L02_P037" (solid, remove dead copper, pour order 37): 755,1690.01 1160,1690.01 1160,1430.01 755,1430.01 752.5,1432.51 752.5,1692.51
5V on Bottom Layer "5V_L02_P036" (solid, remove dead copper, pour order 36): 700,1690.01 1445,1690.01 1445,1430.01 700,1430.01
no net on Bottom Layer "NONET_L02_P035" (solid, remove dead copper, pour order 35): 750,1695.01 755,1690.01 1160,1690.01 1160,1430.01 750,1430.01
3.3V on Bottom Layer "3.3V_L02_P034" (solid, remove dead copper, pour order 34): 1573.84,850.01 1213.84,850.01 1213.84,1165.78 1573.84,1165.78
3.3V on Bottom Layer "3.3V_L02_P027" (solid, remove dead copper, pour order 27): 1495,960.01 1900,960.01 1900,405.01 1495,405.01
3.3V on Bottom Layer "3.3V_L02_P009" (solid, remove dead copper, pour order 9): 870,1335.01 1090,1335.01 1090,910.01 870,910.01
3.3V on Bottom Layer "3.3V_L02_P008" (solid, remove dead copper, pour order 8): 1055,1105.01 1235,1105.01 1235,740.01 1055,740.01

## Keep-outs
Keep-Out Layer:
  circle w10: c105,105.01 r68.9
  circle w10: c2810,110.01 r68.9
  circle w10: c2810,1580.01 r68.9
  circle w10: c105,1590.01 r68.9

## Silkscreen, mask and mechanical layers (free items; w line width, h text height)
Top Overlay:
  text "PB7" at 868,1658.01 h10
  text "PB6" at 1058,1658.01 h10
  text "PB3" at 1458,1658.01 h10
  text "PA15" at 1648,1658.01 h10
  text "5V" at 1220,1608 h60
  text "GND" at 570,1600 h60
  text "GND" at 1800,1600 h60
  text "GND" at 2030,1555 h60
  text "GND" at 2545,1555 h60
  text "GND" at 2810,1497.71 h60 r270
  text "VCC" at 980,1305.01 h10 r270
  text "PA9" at 2873,1257.01 h10 r270
  text "TX" at 1748.18,1224.55 h60
  text "GND" at 755,1205.01 h10 r90
  text "A" at 2624.53,1169.01 h10
  text "RX" at 1760,1125 h60
  text "PA8" at 2873,1062.01 h10 r270
  text "B" at 2624.53,1059.01 h10
  text "5V" at 2820,920 h60 r270
  text "GND" at 1535,855 h60 r45
  text "CLK" at 1605,785 h60 r45
  text "GND" at 2820,770 h60 r270
  text "DIO" at 1676.38,718.26 h60 r45
  text "PC7" at 2878,637.01 h10 r270
  text "5V" at 1950,605 h60
  text "3.3V" at 1710,600 h60 r45
  text "A" at 2624.53,555.15 h10
  text "3.3V" at 2060,450 h60
  text "PC6" at 2878,442.01 h10 r270
  text "3.3V" at 1825,375 h60 r90
  text "5V" at 2820,325 h60 r270
  text "5V" at 1875,230 h60
  text "5V" at 2270,190 h60
  text "5V" at 2090,165.01 h10
  text "GND" at 2085,55.01 h10
Bottom Overlay:
  text "5V" at 2331,149.01 h10
Mechanical 1:
  circle w10: c105,1590.01 r68.9
  circle w10: c105,105.01 r68.9
  circle w10: c2810,110.01 r68.9
  circle w10: c2810,1580.01 r68.9
  lines w10: 2907.39,1.7 2907.39,1696.7 ; 2915,5.01 5,5.01 5,1700.01 2915,1700.01
Mechanical 15:
  lines w10: 2372.74,1542.27 2374.74,1544.27